# Altium PCB PCB1.PcbDoc
Units mm, origin at the board's own origin, x right, y up, seen from the top; angles counter-clockwise.
Board outline 49.87 x 100 mm, 2 copper layers (Top Layer, Bottom Layer); 57 components, 54 nets, 224 pads, 28 vias.
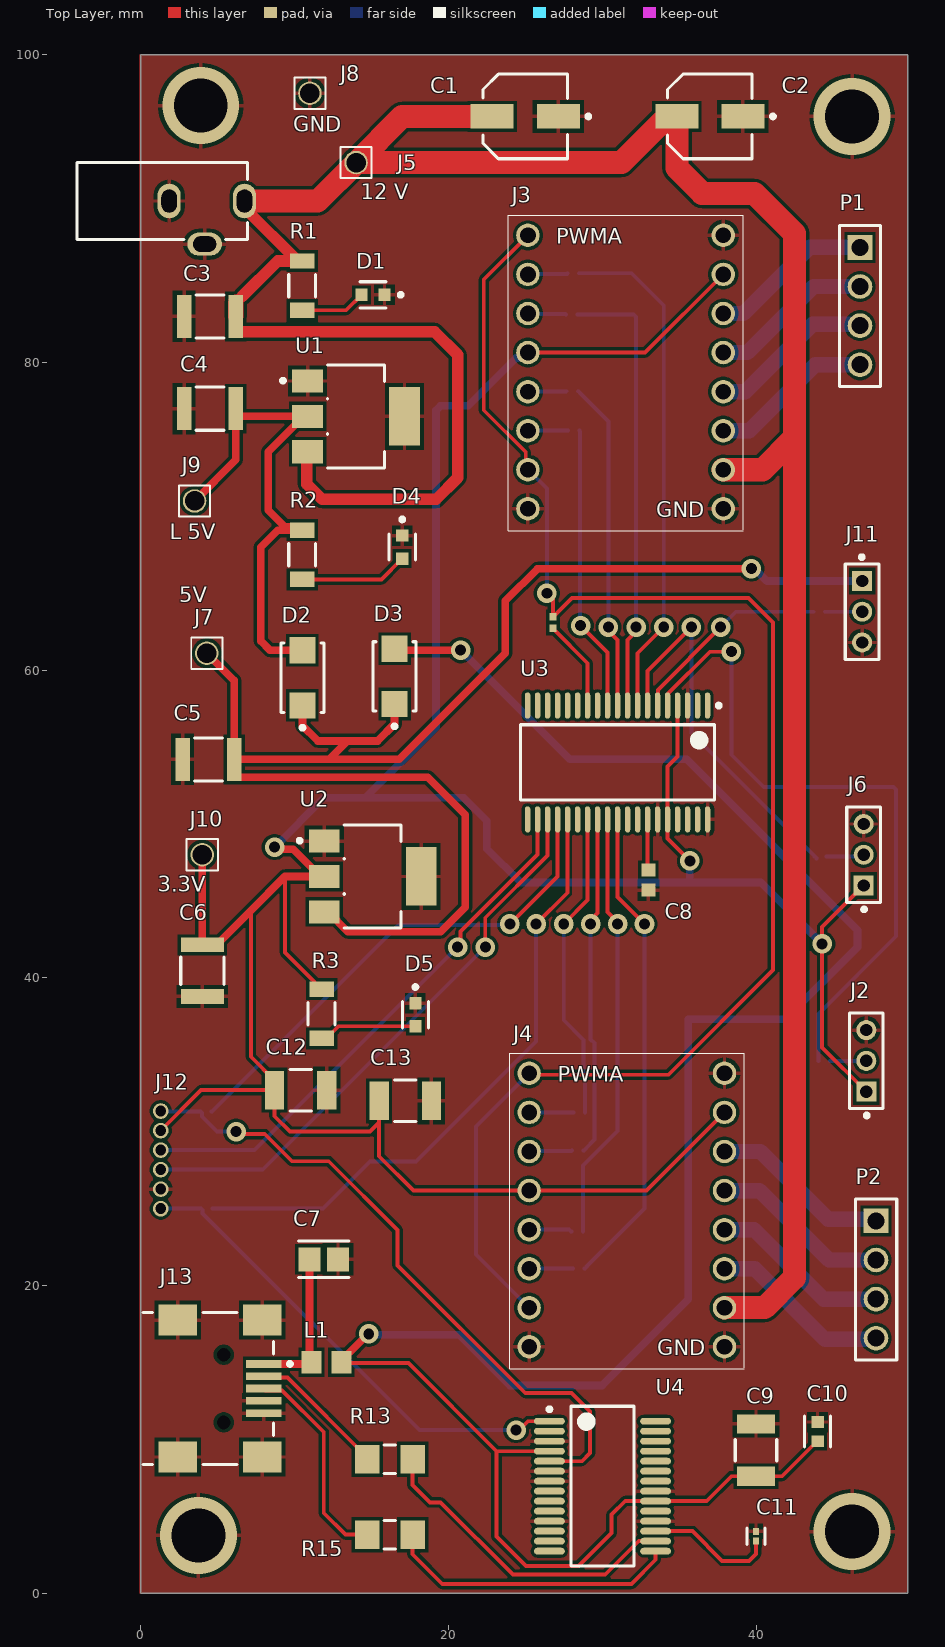
[diagram p0: Top Layer view]
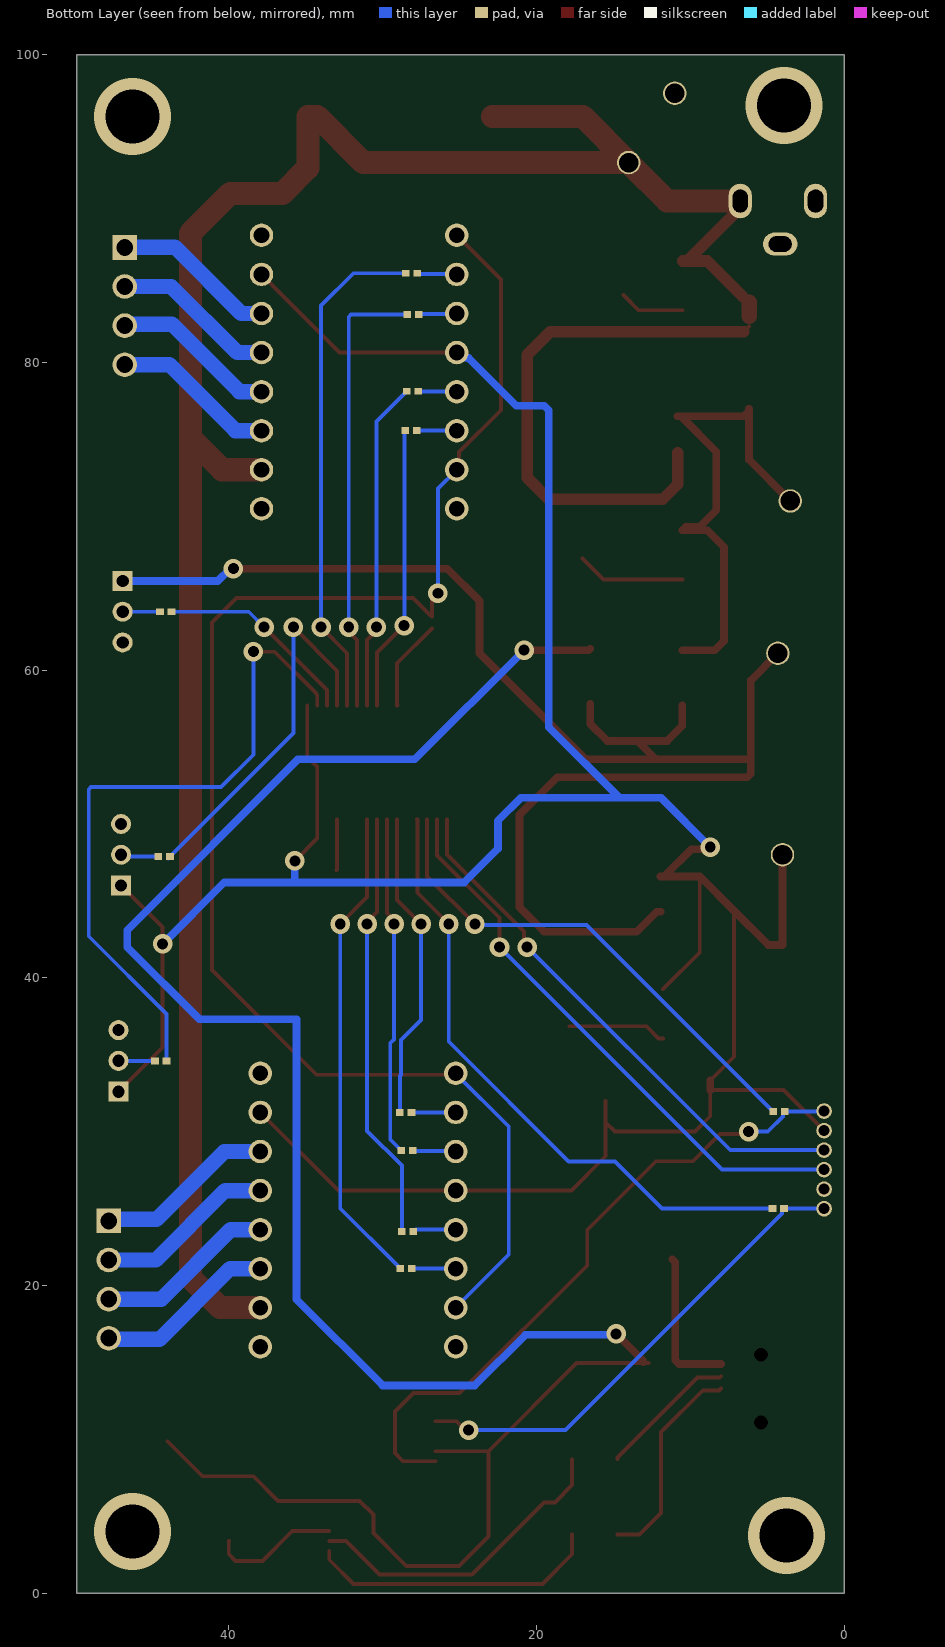
[diagram p1: Bottom Layer view, seen from below]
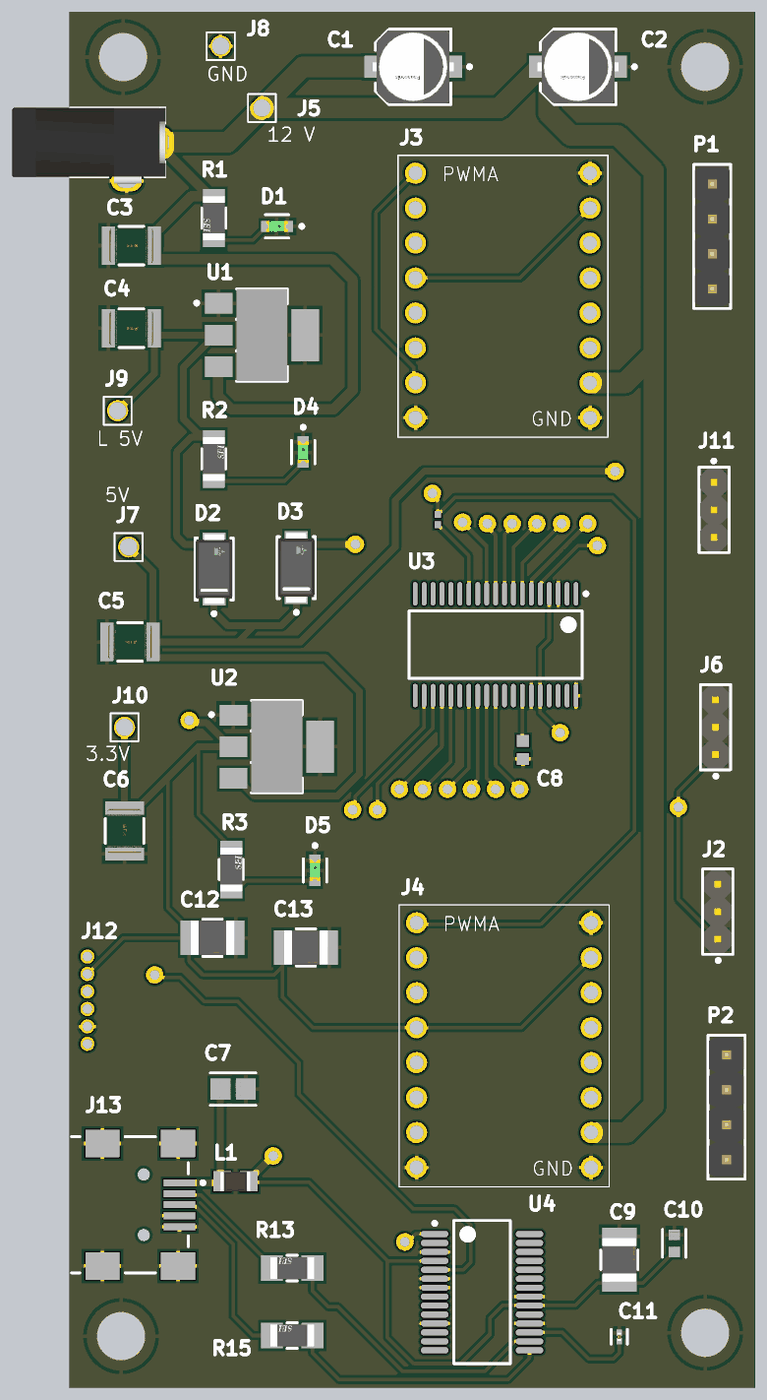
[diagram p2: 3D render of the assembled board from above, using the file's embedded part models]

## Layer stack, top to bottom
Top Solder: solder mask 0.0102, Solder Resist, Dk 3.5
Top Layer: signal copper 0.0356
Dielectric 1: dielectric 0.32, FR-4, Dk 4.8
Bottom Layer: signal copper 0.0356
Bottom Solder: solder mask 0.0102, Solder Resist, Dk 3.5

## Board outline
0,0 49.873,0 49.873,100 0,100

## Design rules (kind name [scope] priority, off if disabled: settings)
Clearance [All] p1: gap=0.2 ignorepadtopadclearanceinfootprint=FALSE
HoleSize [All] p1: absolutevalues=TRUE maxlimit=8 minlimit=0.025 maxpercent=80.000 minpercent=20.000
MinimumSolderMaskSliver [All] p1: minsoldermaskwidth=0.04
PolygonConnect [All] p1: connectstyle=Relief reliefconductorwidth=0.254 reliefentries=4 polygonreliefangle="90 Angle" airgapwidth=0.254
RoutingVias [All] p1: holewidth=0.711 width=1.27 viastyle="Through Hole" minholewidth=0.711 minwidth=1.27 maxholewidth=0.711 maxwidth=1.27
SilkToSolderMaskClearance [IsPad] p1: minsilkscreentomaskgap=0.15 clearancetoexposedcopper=TRUE
SolderMaskExpansion [All] p1: expansion=0.102 istentingtop=FALSE
Width "Width Power (12 V)" [(InNet('12 V') AND InNet('GND'))] p1: maxlimit=2 minlimit=1.75 preferedwidth=1.75
Width "Width Signal" [All] p2: maxlimit=2 minlimit=0.25 preferedwidth=0.254
Width [All] p3: maxlimit=2 minlimit=0.1 preferedwidth=1.75
27 further rules are at their usual default settings.

## Classes and differential pairs
component class Schematic: C1 C2 C3 C4 C5 C6 C7 C8 C9 C10 C11 C12 C13 D1 D2 D3 D4 D5 J2 J3 J4 J5 J6 J7 J8 J9 J10 J11 J12 J13 L1 P1 P2 R1 R2 R3 R4 R13 R15 U1 U2 U3 U4

## Components (designator, comment, footprint, x,y, rotation, side; value= is the part's Value field where it differs from the comment)
C1 "100 uF" FP-FTC-MFG 25,96 r180 top
C2 "100 uF" FP-FTC-MFG 37,96 r180 top
C3 "10 uF" FP-CGA6P-IPC_B 4.5,83 r180 top
C4 "10 uF" FP-CGA6P-IPC_B 4.5,77 r180 top
C5 "10 uF" FP-CGA6P-IPC_B 4.4,54.2 r180 top
C6 "10 uF" FP-CGA6P-IPC_B 4.005,40.465 r270 top
C7 "CL21B103KCANNNC" FP-CL21-IPC_A 11.9,21.7 r180 top
C8 "0.47 uF" CAPC1608X90X35LL15T15 33,46.35 r90 top
C9 "0.1 uF" FP-1210-L_3_2_0_3-W_2_5_0-MFG 40,9.3 r90 top
C10 "4.7 uF" FP-CL10-IPC_C 44,10.5 r90 top
C11 "1 uF" FP-GRM033-0_05-e01_0_2-IPC_B 40,3.706 r90 top
C12 "0.1 uF" FP-1210-L_3_2_0_3-W_2_5_0-MFG 10.4,32.7 r0 top
C13 "0.1 uF" FP-1210-L_3_2_0_3-W_2_5_0-MFG 17.2,32 r0 top
D1 "LTST-C190GKT" FP-LTST-C190GKT-MFG 15.1,84.4 r180 top
D2 "SSA34-E3/61T" FP-95400-MFG 10.516,59.504 r90 top
D3 "SSA34-E3/61T" FP-95400-MFG 16.5,59.6 r90 top
D4 "LTST-C190GKT" FP-LTST-C190GKT-MFG 17,68 r270 top
D5 "LTST-C190GKT" FP-LTST-C190GKT-MFG 17.858,37.602 r270 top
J2 "951103-8622-AR" FP-951103-8622-AR-MFG 47.168,34.602 r90 top
J3 "Pololu Motor Driver" "Pololu Motor Driver-Footprint-2" 25.171,88.268 r0 top
J4 "Pololu Motor Driver" "Pololu Motor Driver-Footprint-2" 25.25,33.79 r0 top
J5 "Test Point" "Test Point-Footprint-1" 14,93 r0 top
J6 "951103-8622-AR" FP-951103-8622-AR-MFG 47,48 r90 top
J7 "Test Point" "Test Point-Footprint-1" 4.3,61.1 r0 top
J8 "Test Point" "Test Point-Footprint-1" 11,97.5 r0 top
J9 "Test Point" "Test Point-Footprint-1" 3.5,71 r0 top
J10 "Test Point" "Test Point-Footprint-1" 4,48 r0 top
J11 "951103-8622-AR" FP-951103-8622-AR-MFG 46.9,63.8 r270 top
J12 "M50-3930642" M50-3930642-Footprint-1 1.3,24.99 r180 top
J13 "KMBX-SMT-5S-S-30TR" KYCN-KMBX-SMT-5S-S-30TR_V 5.2,13.3 r270 top
L1 "MI0805K601R-10" LIRD-MI0805K601R-10-2_V 12.073,15 r180 top
P1 "61300411121" 61300411121 46.761,83.671 r270 top
P2 "61300411121" 61300411121 47.803,20.385 r270 top
R1 "RMCF1206JT1K00" FP-RMCF1206-MFG 10.5,85 r270 top
R2 "RMCF1206JT1K00" FP-RMCF1206-MFG 10.5,67.5 r90 top
R3 "RMCF1206JT1K00" FP-RMCF1206-MFG 11.762,37.666 r90 top
R13 "27 Ohm" FP-RMCF1206-IPC_A 16.2,8.7 r180 top
R15 "27 Ohm" FP-RMCF1206-IPC_A 16.2,3.8 r180 top
R? "RC0402FR-07150RL" RESC1005X40X25LL05T10 44.425,34.6 r180 bottom
U1 "NCP1117ST50T3G" FP-318H-MFG 14,76.5 r0 top
U2 "NCP1117LPST33T3G" FP-318H-MFG 15.081,46.59 r0 top
U3 "MSP430FR5739IDA" TI-DA38_N 31,54 r270 top
U4 "CY7C65213-28PVXI" CYP-PVX28_N 30.019,6.95 r0 top
? "694103303002" 694103303002 1.4,90.5 r270 top
? "RC0402FR-07150RL" RESC1005X40X25LL05T10 28.149,75.568 r0 bottom
? "RC0402FR-07150RL" RESC1005X40X25LL05T10 28.016,83.112 r0 bottom
? "RC0402FR-07150RL" RESC1005X40X25LL05T10 4.275,25 r180 bottom
? "RC0402FR-07150RL" RESC1005X40X25LL05T10 28.124,85.805 r0 bottom
? "RC0402FR-07150RL" RESC1005X40X25LL05T10 44.1,63.8 r180 bottom
? "RC0402FR-07150RL" RESC1005X40X25LL05T10 26.8,63.1 r270 top
? "RC0402FR-07150RL" RESC1005X40X25LL05T10 4.225,31.3 r180 bottom
? "RC0402FR-07150RL" RESC1005X40X25LL05T10 44.2,47.9 r180 bottom
? "RC0402FR-07150RL" RESC1005X40X25LL05T10 28.411,28.767 r0 bottom
? "RC0402FR-07150RL" RESC1005X40X25LL05T10 28.5,31.25 r0 bottom
? "RC0402FR-07150RL" RESC1005X40X25LL05T10 28.048,78.134 r0 bottom
? "RC0402FR-07150RL" RESC1005X40X25LL05T10 28.475,21.1 r0 bottom
? "RC0402FR-07150RL" RESC1005X40X25LL05T10 28.375,23.5 r0 bottom

## Footprints (in the part's own frame and the unit in brackets; to place one, negate y for a bottom-side part, rotate by r counter-clockwise, add the part's x,y. Pads: shape width x height; smd on the part's side, far side on the other; paste and mask are expansions set on the pad)
61300411121 [mm] "Pin Header, pitch 2.54 mm, THT, Vertical, single row, 4p"
  rect 1.6x1.6 hole 1.1: 1(-3.81,0)
  round 1.6 hole 1.1: 2(-1.27,0) 3(1.27,0) 4(3.81,0)
  silkscreen extent -5.23,-1.35 5.23,1.35, body extent -5.08,-1.27 5.08,1.27, height 8.57
694103303002 [mm] "DC Power Jack Right Angled(4.2)"
  oval 2.25x1.5 hole 1 slot 1.5 at 0 deg: 1(0,5.35) 2(0,0.45)
  oval 1.5x2.25 hole 1 slot 1.5 at 90 deg: 3(2.8,2.75)
  silkscreen extent -2.5,-5.55 2.5,5.55, body extent -2.5,-5.55 3,5.75, height 7.8
CAPC1608X90X35LL15T15 [mm] "Chip Capacitor, 2-Leads, Body 1.60x0.81mm, IPC High Density"
  rect 0.85x0.9 smd: 1(-0.65,0) 2(0.65,0)
  body extent -0.88,-0.48 0.87,0.48, height 0.9
CYP-PVX28_N [mm] "SOP, 28-Leads, Body 10.2x5.3mm, Pitch 0.65mm, IPC Medium Density"
  oval 2x0.45 smd: 1(-3.45,4.225) 2(-3.45,3.575) 3(-3.45,2.925) 4(-3.45,2.275) 5(-3.45,1.625) 6(-3.45,0.975) 7(-3.45,0.325) 8(-3.45,-0.325) 9(-3.45,-0.975) 10(-3.45,-1.625) 11(-3.45,-2.275) 12(-3.45,-2.925) 13(-3.45,-3.575) 14(-3.45,-4.225) 15(3.45,-4.225) 16(3.45,-3.575) 17(3.45,-2.925) 18(3.45,-2.275) 19(3.45,-1.625) 20(3.45,-0.975) 21(3.45,-0.325) 22(3.45,0.325) 23(3.45,0.975) 24(3.45,1.625) 25(3.45,2.275) 26(3.45,2.925) 27(3.45,3.575) 28(3.45,4.225)
  silkscreen extent -3.57,-5.2 2.05,5.2, body extent -2.8,-5.2 2.8,5.2, height 2
FP-318H-MFG [mm]
  rect 2x1.5 smd paste+0 mask+0: 1(-3.15,2.3) 2(-3.15,0) 3(-3.15,-2.3)
  rect 2x3.8 smd paste+0 mask+0: 4(3.15,0)
  silkscreen extent -4.87,-3.35 1.85,3.35, body extent -4.25,-3.68 4.25,3.68, height 0.25
FP-1210-L_3_2_0_3-W_2_5_0-MFG [mm]
  rect 1.25x2.5 smd paste+0 mask+0: 1(-1.7,0) 2(1.7,0)
  silkscreen extent -0.7,-1.35 0.7,1.35, body extent -2.42,-1.45 2.42,1.45, height 0.25
FP-95400-MFG [mm]
  rect 1.7x1.68 smd paste+0 mask+0: 1(-1.79,0) 2(1.79,0)
  silkscreen extent -3.37,-1.4 2.25,1.4, body extent -2.74,-1.5 2.74,1.5, height 0.25
FP-951103-8622-AR-MFG [mm]
  rect 1.3x1.3 hole 0.8 paste-1000 mask+0: 1(-2,0)
  round 1.3 hole 0.8 paste-1000 mask+0: 2(0,0) 3(2,0)
  silkscreen extent -3.67,-1.1 3.1,1.1, body extent -3.2,-1.2 3.2,1.2, height 0.25
FP-CGA6P-IPC_B [mm]
  rect 0.953x2.804 smd paste+0 mask+0: 1(-1.675,0) 2(1.675,0)
  silkscreen extent -0.9,-1.4 0.9,1.4, body extent -2.4,-1.65 2.4,1.65, height 0.25
FP-CL10-IPC_C [mm]
  rect 0.758x0.812 smd paste+0 mask+0: 1(-0.627,0) 2(0.627,0)
  silkscreen extent -1.01,-0.85 1.01,0.85, body extent -1.11,-0.55 1.11,0.55, height 0.25
FP-CL21-IPC_A [mm]
  rect 1.455x1.556 smd paste+0 mask+0: 1(-0.926,0) 2(0.926,0)
  silkscreen extent -1.65,-1.18 1.65,1.18, body extent -2.15,-1.28 2.15,1.28, height 0.25
FP-FTC-MFG [mm]
  rect 2.8x1.6 smd paste+0 mask+0: 1(-2.15,0) 2(2.15,0)
  silkscreen extent -4.23,-2.75 2.75,2.75, body extent -3.8,-3 3.8,3, height 0.25
FP-GRM033-0_05-e01_0_2-IPC_B [mm]
  rect 0.461x0.372 smd paste+0 mask+0: 1(-0.306,0) 2(0.306,0)
  silkscreen extent -0.54,-0.59 0.54,0.59, body extent -0.69,-0.34 0.69,0.34, height 0.25
FP-LTST-C190GKT-MFG [mm]
  rect 0.8x0.8 smd paste+0 mask+0: 1(-0.75,0) 2(0.75,0)
  silkscreen extent -1.92,-0.85 0.85,0.85, body extent -1.25,-0.55 1.25,0.55, height 0.25
FP-RMCF1206-IPC_A [mm]
  rect 1.604x1.858 smd paste+0 mask+0: 1(-1.476,0) 2(1.476,0)
  silkscreen extent -0.37,-0.93 0.37,0.93, body extent -2.78,-1.43 2.78,1.43, height 0.25
FP-RMCF1206-MFG [mm]
  rect 1x1.6 smd paste+0 mask+0: 1(-1.6,0) 2(1.6,0)
  silkscreen extent -0.72,-0.87 0.72,0.87, body extent -2.2,-0.97 2.2,0.97, height 0.25
KYCN-KMBX-SMT-5S-S-30TR_V [mm] "SMD, 5-Leads, Body 9.9x9.2mm, Pitch 0.8mm"
  rect 0.5x2.3 smd: 1(-1.6,2.8) 2(-0.8,2.8) 3(0,2.8) 4(0.8,2.8) 5(1.6,2.8)
  rect 2x2.5 smd: 6(-4.45,2.7) 7(4.45,2.7) 8(-4.45,-2.8) 9(4.45,-2.8)
  round 0.6 hole 0.9 unplated: MH1(-2.2,0.2) MH2(2.2,0.2)
  silkscreen extent -4.95,-5.05 4.95,4.63, body extent -4.95,-5.75 4.95,3.45, height 3.9
LIRD-MI0805K601R-10-2_V [mm] "Chip Bead, 2-Leads, Body 2.2 x1.45 mm"
  rect 1.285x1.47 smd: 1(-0.972,0) 2(0.972,0)
  body extent -1.1,-0.72 1.1,0.73, height 1.1
M50-3930642-Footprint-1 [mil]
  round 40 hole 28: 1(0,0) 2(0,-50) 3(0,-100) 4(0,-150) 5(0,-200) 6(0,-250)
"Pololu Motor Driver-Footprint-2" [mil]
  round 60 hole 40.16 paste+0: 1(0,0)
  round 60 hole 40.16: 2(0,-100) 3(0,-200) 4(0,-300) 5(0,-400) 6(0,-500) 7(0,-600) 8(0,-700) 9(500,-700) 10(500,-600) 11(500,-500) 12(500,-400) 13(500,-300) 14(500,-200) 15(500,-100) 16(500,0)
  silkscreen extent -50,-755 551,51
RESC1005X40X25LL05T10 [mm] "Chip Resistor, 2-Leads, Body 1.00x0.50mm, IPC High Density"
  rect 0.5x0.45 smd: 1(-0.375,0) 2(0.375,0)
  body extent -0.53,-0.27 0.53,0.28, height 0.4
"Test Point-Footprint-1" [mil]
  round 60 hole 50: 1(0,0)
  silkscreen extent -40,-40 40,40
TI-DA38_N [mm] "SOP, 38-Leads, Body 12.5x6.1mm, Pitch 0.65mm, IPC Medium Density"
  oval 1.7x0.35 smd: 1(-3.7,5.85) 2(-3.7,5.2) 3(-3.7,4.55) 4(-3.7,3.9) 5(-3.7,3.25) 6(-3.7,2.6) 7(-3.7,1.95) 8(-3.7,1.3) 9(-3.7,0.65) 10(-3.7,0) 11(-3.7,-0.65) 12(-3.7,-1.3) 13(-3.7,-1.95) 14(-3.7,-2.6) 15(-3.7,-3.25) 16(-3.7,-3.9) 17(-3.7,-4.55) 18(-3.7,-5.2) 19(-3.7,-5.85) 20(3.7,-5.85) 21(3.7,-5.2) 22(3.7,-4.55) 23(3.7,-3.9) 24(3.7,-3.25) 25(3.7,-2.6) 26(3.7,-1.95) 27(3.7,-1.3) 28(3.7,-0.65) 29(3.7,0) 30(3.7,0.65) 31(3.7,1.3) 32(3.7,1.95) 33(3.7,2.6) 34(3.7,3.25) 35(3.7,3.9) 36(3.7,4.55) 37(3.7,5.2) 38(3.7,5.85)
  silkscreen extent -3.82,-6.3 2.45,6.7, body extent -3.1,-6.3 3.1,6.3, height 1.2

## Part data
C1 C2: library part CMP-05427-000077-1, "CAP ALUM 100UF 20% 16V SMD", Capacitance=100uF, Case/Package=Radial, ESR (Equivalent Series Resistance)=360mR, Leakage Current=16uA, Max Operating Temperature=105°C, Min Operating Temperature=-55°C, Package Quantity=1000, Ripple Current=240mA, Tolerance=20%, Voltage=16V, Construction=Cylindrical, Contact Plating=Tin, Diameter=5mm, Height=5.8mm, Height - Seated (Max)=0.24inch, Lead Diameter=0.65mm, Lead Pitch=1.5mm, Length=5.8mm, Life (Hours)=2000Hour, Mount="Surface Mount", Packaging="Tape and Reel", Radiation Hardening=No, REACH SVHC="No SVHC", Ripple Current (AC)=240mA, RoHS Compliant=Yes, Series=FT, Termination=SMD/SMT, Voltage Rating=16V, Voltage Rating (DC)=16V
C3 C4 C5 C6: library part CMP-08246-001838-1, "Cap Ceramic 10uF 25V X7R 20% Pad SMD 1210 +125°C Automotive T/R", Capacitance=10uF, Case Code (Imperial)=1210, Case Code (Metric)=3225, Dielectric=X7R, Max Operating Temperature=125°C, Min Operating Temperature=-55°C, Package Quantity=1, Ratings=AEC-Q200, Tolerance=20%, Voltage Rating=25V, Case/Package=1210, Composition=Ceramic, Depth=2.5mm, Height=2.5mm, Length=3.2mm, Mount="Surface Mount", Packaging="Tape and Reel", Termination=SMD/SMT, Thickness=0.11inch, Voltage Rating (DC)=25V, Weight=0.000564oz, Width=0.098inch
C7: library part CMP-13271-003077-1, "CL21 Series 0805 10nF 100V ±10% Tolerance X7R Multilayer Ceramic Chip Capacitor", Capacitance=10nF, Case Code (Imperial)=0805, Case Code (Metric)=2012, Dielectric=X7R, Max Operating Temperature=125°C, Min Operating Temperature=-55°C, Package Quantity=1, Tolerance=10%, Voltage=100V, Case/Package=0805, Contact Plating=Tin, Depth=1.25mm, Height=0.65mm, Length=2mm, Material=Ceramic, Mount="Surface Mount", Packaging="Tape and Reel", Radiation Hardening=No, Thickness=0.03inch, Voltage Rating=100V, Width=0.049inch
C8: library part CMP-2006-04570-1, Manufacturer="AVX Interconnect / Elco", Part Number=0603ZG474ZAT2A
C9 C12 C13: library part CMP-14477-003861-2, "None", Capacitance=100nF, Case Code (Imperial)=1210, Case Code (Metric)=3225, Dielectric=X7R, Dielectric Material=Ceramic, Max Operating Temperature=125°C, Min Operating Temperature=-55°C, Package Quantity=2000, Tolerance=20%, Voltage Rating=100V, Case/Package=1210, Construction=Flat, Depth=2.5mm, Halogen Free="Halogen Free", Height=1.15mm, Length=0.126inch, Mount="Surface Mount", Number of Pins=2, Packaging="Tape and Reel", Radiation Hardening=No, Resistor Type=Ceramic, RoHS Compliant=Yes, Series=M, Termination=SMD/SMT, Thickness=0.049inch, Voltage Rating (DC)=100V, Width=0.098inch
C10: library part CMP-13271-003017-1, "Cap Ceramic 4.7uF 10V X5R ±10% Pad SMD 0603 +85°C T/R", Capacitance=4.7uF, Case Code (Imperial)=0603, Case Code (Metric)=1608, Dielectric=X5R, Max Operating Temperature=85°C, Min Operating Temperature=-55°C, Package Quantity=1, Tolerance=10%, Voltage Rating=10V, Case/Package=0603, Contact Plating=Tin, Depth=0.8mm, Height=0.8mm, Length=1.6mm, Mount="Surface Mount", Packaging="Tape and Reel", Radiation Hardening=No, Thickness=0.035inch, Width=0.031inch
C11: library part CMP-06035-049033-1, "Chip Multilayer Ceramic Capacitors for General Purpose, 0201, 1.0uF, X5R, 15%, 20%, 6.3V", Capacitance=1uF, Case Code (Imperial)=0201, Case Code (Metric)=0603, Dielectric=X5R, Max Operating Temperature=85°C, Min Operating Temperature=-55°C, Package Quantity=1, Tolerance=20%, Voltage=6.3V, Case/Package=0201, Depth=0.3mm, Height=0.3mm, Lead Free="Lead Free", Length=0.6mm, Mount="Surface Mount", Packaging="Cut Tape", REACH SVHC="No SVHC", Termination=SMD/SMT, Thickness=300um, Voltage Rating=6.3V, Voltage Rating (DC)=6.3V, Weight=1.2E-05oz, Width=0.3mm
D1 D4 D5: library part CMP-22017-000005-2, "LED GREEN CLEAR CHIP SMD", Case Code (Imperial)=0603, Case Code (Metric)=1608, Color=Green, Forward Current=30mA, Forward Voltage=2.1V, Lens Color=Colorless, Max Operating Temperature=85°C, Min Operating Temperature=-55°C, Package Quantity=1, Power Dissipation=100mW, Reverse Voltage=5V, Test Current=10mA, Voltage=2V, Case/Package=0603, Depth=0.8mm, Dominant Wavelength=569nm, Height=0.8mm, Illumination Color=Green, Lead Free="Lead Free", Length=1.6mm, Lens Style=Clear, Lens Transparency=Clear, Luminous Intensity=6mcd, Mount="Surface Mount", Number of Elements=1, Number of LEDs=1, Number of Pins=2, Packaging="Tape and Reel", Power Rating=100mW, Radiation Hardening=No, Viewing Angle=130°, Wavelength=565nm, Width=0.8mm
D2 D3: library part CMP-02539-000022-2, "DIODE SCHOTTKY 40V 3A DO214AC", Average Rectified Current=3A, Case/Package=SMA, Forward Voltage=490mV, Max Forward Surge Current (Ifsm)=75A, Max Operating Temperature=150°C, Max Repetitive Reverse Voltage (Vrrm)=40V, Max Reverse Current=200uA, Min Operating Temperature=-65°C, Package Quantity=1, Contact Plating=Tin, Current Rating=3A, Element Configuration=Single, Forward Current=3A, Height=2.087mm, Lead Free="Lead Free", Length=4.5mm, Max Reverse Leakage Current=200uA, Max Reverse Voltage (DC)=40V, Max Surge Current=75A, Mount="Surface Mount", Number of Pins=2, Output Current=3A, Packaging="Tape and Reel", Peak Non-Repetitive Surge Current=75A, Polarity=Standard, Radiation Hardening=No, RoHS Compliant=Yes, Voltage Rating (DC)=40V, Width=2.79mm
J2 J6 J11: library part CMP-05379-000003-1, "CONN HEADER VERT 3POS 2MM", Current Rating=2A, Manufacturer=3M, Temperature="-55°C to +125°C", Temperature Range High=+125°C, Temperature Range Low=-55°C, Automotive=No, Category=Conn, ComponentLink2Description=Datasheet, ComponentLink2URL=http://multimedia.3m.com/mws/media/1400506O/3m-pin-strip-header-951-series-78-5100-2653-3.pdf, Conn Gender=Male, Conn Orientation=Straight, Contact Material=Gold,Nickel, Device Class L1=Connectors, Device Class L2="Headers and Wire Housings", Device Class L3=unset, Digikey Description="CONN HEADER VERT 3POS 2MM", Height=6.3mm, Lead Free=Yes, Manufacturer Part Number=951103-8622-AR, Mouser Description="Header; PinStrip; CopperAlloy; HighTempThermoplastic; 3Cnts; 1A; RtAngle; 951Series", Number Of Contacts=3, Number Of Rows=1, Octopart=https://octopart.com/951103-8622-ar-3m-14400669, Package=951103-8622-AR, Pitch=2mm, RoHS=TRUE
J3 J4: library part CMP-00028-00007-3, "Set up for the Pololu Motor Driver"
J5 J7 J8 J9 J10: library part CMP-00000-3, "Test point to check infromation about pcb"
J12: library part CMP-002-00071-5, "Btb Conn, Header, 6Pos, 1Rows, 1.27Mm; Rohs Compliant: Yes", Current Rating=1A, Flammability Rating="UL94 V-0", Insulation Color=Black, Max Operating Temperature=105°C, Min Operating Temperature=-40°C, Connector Type=Header, Contact Finish - Mating=GOLD, Contact Material=Brass, Contact Plating=Gold, Contact Shape=Square, Contact Type="Male Pin", Fastening Type=Pull, Insulation Material=Nylon, Mount="Through Hole", Number of Positions=6, Number Of Rows=1, Packaging=Bulk, Series="Archer M50", Termination=Solder
J13: library part CMP-1673-00002-6, "Female Mini-USB, RA, -55 to 85 degC, 5-Pin SMD, RoHS, Tape and Reel", Colour=Black, Current Rating="1 A", Manufacturer=Kycon, ComponentLink1Description="Manufacturer URL", ComponentLink1URL=http://www.kycon.com/, ComponentLink2Description=Datasheet, ComponentLink2URL=https://datasheet.ciiva.com/4599/kmbx-smt-5s-s-30tr-180268-4599029.pdf, Connector Type=USB, Contact Material=Bronze, Contact Plating=Gold, DatasheetVersion="Rev. A7, 11/2013", Height="3.9 mm", Lead Pitch="0.8 mm", Length="9.9 mm", Mount="Surface Mount", Mounting Technology="Surface Mount", PackageDescription="5-Pin Surface Mount Device, Body 9.9 x 9.2 mm, Pitch 0.8 mm", PackageReference=KMBX-SMT-5S-S-30TR, Packaging="Tape and Reel", Pins=5, RoHSCompliant=true
L1: library part CMP-2000-05196-1, "Chip Bead for Power Filtering, 1500 mA, 600 Ohm, -40 to 125 degC, 0805 (2012 Metric), RoHS, Tape and Reel", Current Rating (Max)=1.5A, DC Resistance (DCR) (Max)=100mOhm, Impedance @ Frequency=600Ohm@100MHz, Manufacturer=Laird, Operating Temperature=-40degC~125degC, Package / Case=0805(2012Metric), Package Description="2-Pin Surface Mount Device, Body 2 x 1.25 mm", Package Reference=MI0805K601R-10-2, Ratings=-, Standard Package=1, Catalog Drawings=(HI,HZ,LI,MI)0805Series_1.10mmMax.Height, Category=Filters, Datasheet URL=https://datasheet.ciiva.com/3082/mi0805k601r-10-a-vp-3082219.pdf, Datasheet Version="Rev. A, 01/2004", Family=FerriteBeadsandChips, Filter Type=PowerLine, Height (Max)="0.043\"(1.10mm)", Kits=240-2227-ND-KITEMIFERRITEBEADCHIPSMD, Manufacturer URL=https://www.lairdtech.com, Mounting Type=SurfaceMount, Number of Lines=1, Online Catalog=MISeries, Other Names=240-2390-1, Packaging=CutTape(CT), Series=MI, Size / Dimension="0.079\"Lx0.049\"W(2.00mmx1.25mm)"
P1 P2: library part CMP-1502-01064-1, "THT Vertical Pin Header WR-PHD, Pitch 2.54 mm, Single Row, 4 pins", Contact Resistance=20mOhm, Manufacturer="Wurth Elektronik", Operating Temperature=-40to105degC, Rated Current=3A, Withstanding Voltage=500VAC, Working Voltage=250VAC, Datasheet URL=https://katalog.we-online.de/em/datasheet/6130xx11121.pdf, Gender=Male, Manufacturer URL=http://www.we-online.de, Mounting Technology=THT, Orientation=Vertical, Package Reference=61300411121, Packaging=Bag, Part Number=61300411121, Pin Number=4, Pitch=2.54mm, Publisher=WurthElektronik, Row Number=Single
R1 R2 R3: library part CMP-26527-000044-1, "1kΩ ±5% 0.25W 1206 Thick Film Chip Resistor AEC-Q200 compliant", Case Code (Imperial)=1206, Case Code (Metric)=3216, Max Operating Temperature=155°C, Max Power Dissipation=250mW, Min Operating Temperature=-55°C, Resistance=1kR, Resistor Type="Thick Film", Temperature Coefficient=200ppm/°C, Tolerance=5%, Working Voltage=200V, Case/Package=1206, Construction=Rectangular, Contact Plating=Tin, Depth=1.6mm, Features="Automotive AEC-Q200", Height=0.028inch, Lead Free="Lead Free", Length=3.2mm, Military Standard=Not, Mount="Surface Mount", Number of Terminations=2, Packaging="Tape and Reel", Power Rating=250mW, Radiation Hardening=No, RoHS Compliant=Yes, Series=RMCF, Width=0.063inch
R13 R15: library part CMP-26527-000116-1, "27Ω ±5% 0.25W 1206 Thick Film Chip Resistor AEC-Q200 compliant", Case Code (Imperial)=1206, Case Code (Metric)=3216, Max Operating Temperature=155°C, Max Power Dissipation=250mW, Min Operating Temperature=-55°C, Resistance=27R, Resistor Type="Thick Film", Temperature Coefficient=200ppm/°C, Tolerance=5%, Case/Package=1206, Contact Plating=Tin, Features="Automotive AEC-Q200", Height=0.028inch, Length=0.126inch, Mount="Surface Mount", Number of Terminations=2, Packaging="Tape and Reel", Radiation Hardening=No, RoHS Compliant=Yes, Series=RMCF, Width=0.063inch
R? ? ? ? ? ? ? ? ? ? ? ? ? ?: library part CMP-2002-07401-1, Manufacturer="Yageo / Phycomp", Part Number=RC0402FR-07150RL
U1: library part CMP-0592-00001-4, "IC REG LINEAR 5V 1A SOT223", Case/Package=SOT-223, Dropout Voltage=1.2V, Input Bias Current=6mA, Max Input Voltage=20V, Max Operating Temperature=125°C, Max Output Current=1A, Min Input Voltage=3.5V, Min Operating Temperature=0°C, Nominal Output Voltage=5V, Output Voltage Accuracy=1%, Package Quantity=1, Power Rating=781mW, Quiescent Current=10mA, Accuracy=1%, Contact Plating=Tin, Halogen Free="Halogen Free", Height=1.69mm, Lead Free="Lead Free", Length=6.7mm, Min Current Limit=1A, Number of Outputs=1, Number of Pins=4, Number of Regulators=1, Output Current=1A, Output Type=Fixed, Output Voltage=5V, Packaging="Tape and Reel", Polarity=Positive, Radiation Hardening=No, REACH SVHC="No SVHC", RoHS Compliant=Yes, Tolerance=1%, Width=3.7mm
U2: library part CMP-07128-000031-1, "IC REG LINEAR 3.3V 1A SOT223", Case/Package=SOT-223, Dropout Voltage=1.3V, Max Input Voltage=18V, Max Operating Temperature=125°C, Max Output Current=1A, Min Current Limit=1.1A, Min Input Voltage=-300mV, Min Operating Temperature=0°C, Min Output Voltage=3.3V, Package Quantity=1, Power Supply Rejection Ratio (PSRR)=60dB, Quiescent Current=700uA, Reference Voltage=1.275V, Contact Plating=Tin, Halogen Free="Halogen Free", Height=1.69mm, Lead Free="Lead Free", Length=6.7mm, Mount="Surface Mount", Nominal Output Voltage=3.3V, Number of Outputs=1, Number of Pins=3, Number of Regulators=1, Output Current=1A, Output Type=Fixed, Output Voltage=3.3V, Packaging="Tape and Reel", Polarity=Positive, REACH SVHC="No SVHC", Width=3.7mm
U3: library part CMP-0365-00023-1, "24 MHz Mixed Signal Microcontroller, 1024 B SRAM and 33 GPIOs, -40 to 85 degC, 38-pin SOP (DA), Green (RoHS & no Sb/Br)", Frequency(MHz)=24, Manufacturer="Texas Instruments", ADC="10-bit SAR", ADC Channels=14, Brown Out Reset=Yes, Code_JEDEC=MO-153, Comparators=Yes, ComponentLink1Description="Manufacturer URL", ComponentLink1URL=http://www.ti.com/, ComponentLink2Description=Datasheet, ComponentLink2URL=http://www.ti.com/general/docs/lit/getliterature.tsp?genericPartNumber=MSP430FR5739&fileType=pdf, ComponentLink3Description="Package Specification", ComponentLink3URL=http://www.ti.com/lit/ml/mtss002e/mtss002e.pdf, DatasheetVersion=SLAS639D, DMA=3, Eco-Plan="Green (RoHS & no Sb/Br)", FRAM(KB)=16, GPIO=33, Mounting Technology="Surface Mount", Multiplier=32x32, PackageDescription="38-Pin Plastic Small-Outline Package, Body 6.10 x 12.50 mm, Pitch 0.65 mm", PackageReference=DA38, PackageVersion=4040066/F, PartNumber=MSP430FR5739IDA, Real-Time Clock=Yes, SRAM(B)=1024, SubFamily="FRAM Series", SVS=Yes, Timers - 16-bit=5, USCI_A (UART/LIN/IrDA/SPI)=2, USCI_B (I2C & SPI)=1, Watchdog=Yes
U4: library part CMP-0967-00144-1, "USB-UART LP Bridge Controller, 0.5 KB, 8 I/Os, 1.71 to 5.5 V, -40 to 85 degC, 28-Pin SSOP (PVX28), Tray", Manufacturer=Cypress, Max. Operating Temp. (degreesC)=85, Max. Operating Voltage (V)=5.5, Min. Operating Temp. (degreesC)=-40, Min. Operating Voltage (V)=1.71, ComponentLink1Description="Manufacturer URL", ComponentLink1URL=http://www.cypress.com/, ComponentLink2Description=Datasheet, ComponentLink2URL=http://www.cypress.com/?docID=47660, ComponentLink3Description="Package Specification", ComponentLink3URL=http://www.cypress.com/?docID=1371, CPU Core=M8, DatasheetVersion="Rev. *G", Memory Architecture=Flash, Memory Size (KB)=0.5, Mounting Technology="Surface Mount", No. of I/Os=8, PackageDescription="28-Pin Super Small Outline Package, Body 10.2 x 5.3 mm, Pitch 0.65 mm", PackageReference=PVX28, PackageVersion="Rev. *C, 10/2001", Packing=Tray, PartNumber=CY7C65213-28PVXI, RoHS=Pb-Free
?: library part CMP-1502-00185-1, "DC Power Jack Connector WR-DC, Male, Right Angled, THT, 2 A, 30 V", Manufacturer="Wurth Elektronik", Operating Temperature=-40to85degC, Rated Current=2A, Working Voltage=30V, Datasheet URL=http://katalog.we-online.de/em/datasheet/6941xx303002.pdf, Gender=Male, Manufacturer URL=http://www.we-online.de, Mounting Technology=THT, Opening Diameter=4.2mm, Orientation=RightAngled, Package Reference=694103303002, Packaging=Bag, Part Number=694103303002, Plug Inner Diameter=1.35mm, Plug Outer Diameter=3.5mm, Publisher=WurthElektronik

## Via types
v1: diameter 1.27, hole 0.711, Top Layer to Bottom Layer, 24 vias
v2: diameter 5, hole 3.5, Top Layer to Bottom Layer, 4 vias

## Nets (pads, with @x,y where several pads share a name; then routed paths per layer and width w, separated by ;. In a path a pad name is that pad's centre, name@x,y a point inside that pad or via, vN(x,y) a via of type N, cw(c..) or ccw(c..) an arc to the next point about the centre after c; other vN are vias at no path point)
"5 V": C5.1 D2.1 D3.1 J7.1 J11.1 U2.3 | length 100.4
  Top Layer w0.5: J7.1 6.075,59.325 C5.1 6.075,53.274 6.302,53.048 18.652,53.048 21.1,50.6 21.1,44.6 19.5,43 13.471,43 12.181,44.29 U2.3 ; C5.1@6.227,54.2 12.25,54.2 ; D2.1 10.516,56.384 11.5,55.4 13.45,55.4 ; D3.1 16.5,56.5 15.4,55.4 13.45,55.4 ; v1(39.7,66.6) 25.8,66.6 23.7,64.5 23.7,61.1 16.8,54.2 12.25,54.2 ; 12.25,54.2 13.45,55.4
  Bottom Layer w0.5: v1(39.7,66.6) 39.908,66.6 40.708,65.8 J11.1
"12 V": ?.1@6.75,90.5 C1.2 C2.2 C3.1 J3.10 J4.10 J5.1 R1.1 U1.3 | length 179.2
  Top Layer w0.254: C3.1@6.175,82.35 C3.1@6.525,82 ; ?.1@6.75,90.05 ?.1@6.75,90.5 ; U1.3@10.8,74.15 U1.3
  Top Layer w0.75: C3.1@6.525,82 19.1,82 20.6,80.5 20.6,72.5 19.2,71.1 11.8,71.1 10.8,72.1 U1.3@10.8,74.15 ; C3.1@6.575,84.275 8.9,86.6 R1.1@10.2,86.6 ; ?.1@6.75,90.05 R1.1@10.2,86.6 ; R1.1 R1.1@10.2,86.6
  Top Layer w1: C3.1 C3.1@6.175,83.926
  Top Layer w1.5: ?.1@6.75,90.5 11.5,90.5 J5.1 ; C1.2 17,96 J5.1 ; J3.10 40.428,73.028 42.5,75.1 ; J4.10 37.955,18.555 40.555,18.555 42.5,20.5 42.5,75.1 ; J5.1 31.25,93 34.25,96 C2.2 34.85,92.65 36.5,91 39.9,91 42.5,88.4 42.5,75.1
GND: ?.2@1.85,90.5 ?.3 C1.1 C2.1 C3.2 C4.2 C5.2 C6.2 C7.1 C8.1 C9.2 C10.2 C11.2 C12.2 C13.2 D1.1 D4.1 D5.1 J2.3 J3.8 J3.9 J3.16 J4.8 J4.9 J4.16 J6.3 J8.1 J11.3 J12.2 J13.4 J13.5 J13.6 J13.7 J13.8 J13.9 U1.1 U1.4 U2.1 U2.4 U3.3 U3.33 U3.38 U4.3 U4.6 U4.7 U4.11 U4.18 U4.21
  other v2: 3.75,3.75 46.25,4 46.25,96 3.9,96.7
"Left Limit Signal": J2.2 R?.1 | length 2.4
  Bottom Layer w0.254: J2.2 47.167,34.601 R?.1 ; R?.1 R?.1
"Logic 5V": C4.1 D2.2 J9.1 R2.2 U1.2 | length 33.9
  Top Layer w0.5: J9.1 6.175,73.675 C4.1@6.175,76.85 ; C4.1 C4.1@6.175,76.85 ; D2.2 8.406,61.294 7.8,61.9 7.8,68 8.9,69.1 R2.2 10.27,69.33 9.37,69.33 8.3,70.4 8.3,74.2 U1.2@10.6,76.5 ; U1.2 U1.2@10.6,76.5 ; C4.1@6.175,76.85 6.525,76.5 U1.2@10.6,76.5
"micro 3.3 V": C6.1 C12.1 C13.1 J2.1 J3.4 J3.15 J4.4 J4.15 J6.1 J10.1 J12.5 R3.2 U2.2 U3.4 U3.34 | length 206.2
  Top Layer w0.254: J12.5 3.93,32.7 C12.1 8.7,31 9.7,30 14.9,30 15.5,30.6 ; 7.156,44.365 7.156,34.869 C12.1@8.7,33.325 ; 9.381,46.59 9.381,41.647 R3.2 ; C13.1 15.5,30.6 ; J3.4 32.791,80.648 J3.15 ; U3.4 34.9,54.4 34.25,53.75 U3.34 34.25,49.05 v1(35.7,47.6) ; J4.15 32.87,26.17 J4.4 17.73,26.17 15.5,28.4 15.5,30.6 ; J6.1 44.3,43.3 v1(44.3,42.2) 44.3,35.47 J2.1
  Top Layer w0.5: J10.1 4,42.145 C6.1 4.931,42.14 7.156,44.365 9.381,46.59 U2.2@11.681,46.59 ; C12.1 C12.1@8.7,33.325 ; v1(8.7,48.5) 8.847,48.353 9.918,48.353 U2.2@11.681,46.59 ; U2.2 U2.2@11.681,46.59
  Bottom Layer w0.5: v1(8.7,48.5) 11.9,51.7 14.6,51.7 ; J3.4 24.894,80.648 24.537,80.291 24.391,80.291 21.3,77.2 19.493,77.2 19.2,76.907 19.2,56.3 14.6,51.7 ; v1(35.7,47.6) 35.7,46.2 ; v1(44.3,42.2) 40.3,46.2 35.7,46.2 ; 14.6,51.7 21,51.7 22.5,50.2 22.5,48.4 24.7,46.2 35.7,46.2
NetC7_2: C7.2 J13.1 L1.2 | length 9.7
  Top Layer w0.5: J13.1 10.727,14.9 10.777,14.95 10.976,15.148 10.976,21.502 C7.2@11.174,21.7
NetC8_2: C8.2 U3.32 | length 3.3
  Top Layer w0.254: U3.32 32.95,47.05 C8.2
NetC11_1: C11.1 U4.17 | length 8.4
  Top Layer w0.254: U4.17 35.875,4.025 37.8,2.1 39.551,2.1 40,2.549 40,3.375 39.987,3.388 C11.1
NetD1_2: D1.2 R1.2 | length 4.3
  Top Layer w0.254: R1.2 13.35,83.4 D1.2
NetD4_2: D4.2 R2.1 | length 7.1
  Top Layer w0.254: R2.1 15.65,65.9 D4.2
NetD5_2: D5.2 R3.1 | length 6.4
  Top Layer w0.254: R3.1 12.062,36.066 12.848,36.852 D5.2
NetJ13_2: J13.2 R13.2 | length 9
  Top Layer w0.254: J13.2 8.079,14.021 9.531,14.021 14.724,8.827 R13.2
NetJ13_3: J13.3 R15.2 | length 13.7
  Top Layer w0.254: J13.3 8.123,13.177 9.185,13.177 11.9,10.462 11.9,5.2 13.3,3.8 R15.2
NetR4_2: R?.2 U3.5 | length 44.1
  Top Layer w0.254: U3.5 34.25,58.401 34.321,58.472 34.321,58.506 37.015,61.2 v1(38.4,61.2)
  Bottom Layer w0.254: v1(38.4,61.2) 38.4,54.5 40.5,52.4 48.951,52.4 49.1,52.251 49.1,42.7 44.05,37.65 R?.2
NetR5_1: ?.1@4.6,31.3 U3.23 | length 32.5
  Top Layer w0.254: v1(24,43.5) 27.1,46.6 U3.23
  Bottom Layer w0.254: ?.1@4.6,31.3 4.625,31.3 16.755,43.43 23.93,43.43 v1(24,43.5)
NetR6_2: ?.2@43.725,63.8 U3.6 | length 13.2
  Top Layer w0.254: U3.6 33.618,57.718 33.618,58.718 v1(37.7,62.8)
  Bottom Layer w0.254: v1(37.7,62.8) 38.7,63.8 ?.2@43.725,63.8
NetR7_1: ?.1@4.65,25 U3.24 | length 40.8
  Top Layer w0.254: v1(25.7,43.5) 27.732,45.532 27.732,50.282 U3.24
  Bottom Layer w0.254: ?.1@4.65,25 11.837,25 14.9,28.063 17.9,28.063 25.7,35.863 v1(25.7,43.5)
NetR8_2: ?.2@43.825,47.9 U3.7 | length 24.7
  Top Layer w0.254: U3.7 32.95,59.95 v1(35.8,62.8)
  Bottom Layer w0.254: v1(35.8,62.8) 35.8,55.925 43.702,48.023 43.702,47.998 43.8,47.9 43.837,47.9 43.936,47.802 ?.2@43.936,47.765
NetR9_2: ?.2@26.8,62.725 U3.13 | length 6
  Top Layer w0.254: ?.2@26.8,62.725 26.8,62.7 29.05,60.45 U3.13 U3.13@29.032,57.718
NetR10_2: ?.2@28.499,85.805 U3.8 | length 33.1
  Top Layer w0.254: U3.8 32.3,61.1 v1(34,62.8)
  Bottom Layer w0.254: ?.2@28.499,85.805 31.895,85.805 34,83.7 v1(34,62.8)
NetR11_2: ?.2@28.391,83.112 U3.9 | length 29.4
  Top Layer w0.254: U3.9 31.65,61.975 32.2,62.525 v1(32.2,62.8)
  Bottom Layer w0.254: ?.2@28.391,83.112 32.051,83.112 32.2,82.963 v1(32.2,62.8)
NetR12_2: ?.2@28.423,78.134 U3.10 | length 21.5
  Top Layer w0.254: v1(30.4,62.8) 30.4,62.563 31,61.963 U3.10
  Bottom Layer w0.254: ?.2@28.423,78.134 28.448,78.134 28.546,78.036 28.546,78.011 30.4,76.156 v1(30.4,62.8)
NetR13_1: R13.1 U4.16 | length 20.8
  Top Layer w0.254: R13.1 17.676,7.024 18.8,5.9 19.5,5.9 24.2,1.2 30.2,1.2 32.375,3.375 U4.16
NetR14_2: ?.2@28.524,75.568 U3.11 | length 18.6
  Top Layer w0.254: v1(28.6,62.9) 30.35,61.15 U3.11
  Bottom Layer w0.254: ?.2@28.524,75.568 28.562,75.53 28.562,62.938 v1(28.6,62.9)
NetR15_1: R15.1 U4.15 | length 19.1
  Top Layer w0.254: R15.1 17.676,2.524 19.6,0.6 31.9,0.6 33.469,2.169 U4.15
NetR16_2: ?.2@28.875,31.25 U3.26 | length 20.3
  Top Layer w0.254: v1(27.5,43.5) 29.05,45.05 U3.26
  Bottom Layer w0.254: v1(27.5,43.5) 27.5,37.25 28.796,35.954 28.796,33.691 28.875,33.612 ?.2@28.875,31.25
NetR17_2: ?.2@28.786,28.767 U3.27 | length 22.1
  Top Layer w0.254: v1(29.25,43.5) 29.25,43.775 29.7,44.225 U3.27
  Bottom Layer w0.254: ?.2@28.786,28.767 28.811,28.767 28.909,28.865 28.909,28.89 29.5,29.481 29.5,35.75 29.25,36 v1(29.25,43.5)
NetR18_2: ?.2@28.75,23.5 U3.28 | length 28
  Top Layer w0.254: U3.28 30.35,44.287 31,43.637 v1(31,43.5)
  Bottom Layer w0.254: ?.2@28.75,23.5 28.75,27.794 31,30.044 v1(31,43.5)
NetR19_2: ?.2@28.85,21.1 U3.29 | length 31.6
  Top Layer w0.254: U3.29 31,45.25 v1(32.75,43.5)
  Bottom Layer w0.254: ?.2@28.85,21.1 28.875,21.1 28.973,21.198 28.973,21.223 32.75,25 v1(32.75,43.5)
"Right Limit Signal": ?.1@44.575,47.9 J6.2 | length 2.5
  Bottom Layer w0.254: ?.1@44.575,47.9 46.8,47.9 J6.2@47,48.1
"S1: AIN1": ?.1@27.641,83.112 J3.3 | length 2.5
  Bottom Layer w0.254: J3.3 25.209,83.15 27.603,83.15 ?.1@27.641,83.112
"S1: AIN2": ?.1@27.749,85.805 J3.2 | length 2.6
  Bottom Layer w0.254: J3.2 25.209,85.766 27.711,85.766 ?.1@27.749,85.805
"S1: AO1": J3.14 P1.1 | length 10.7
  Bottom Layer w1: J3.14 39.188,83.188 43.5,87.5 46.742,87.5 P1.1
"S1: AO2": J3.13 P1.2 | length 10.7
  Bottom Layer w1: J3.13 39.448,80.648 43.741,84.941 P1.2
"S1: BIN1": ?.1@27.673,78.134 J3.5 | length 2.5
  Bottom Layer w0.254: J3.5 25.184,78.121 27.66,78.121 ?.1@27.673,78.134
"S1: BIN2": ?.1@27.774,75.568 J3.6 | length 2.6
  Bottom Layer w0.254: J3.6 ?.1@27.774,75.568
"S1: BO1": J3.11 P1.4 | length 10.7
  Bottom Layer w1: J3.11 39.568,75.568 43.861,79.861 P1.4
"S1: BO2": J3.12 P1.3 | length 10.8
  Bottom Layer w1: J3.12 39.308,78.108 43.7,82.5 46.662,82.5 P1.3
"S2: AIN1": ?.1@28.036,28.767 J4.3 | length 2.8
  Bottom Layer w0.254: J4.3 25.278,28.738 28.007,28.738 ?.1@28.036,28.767
"S2: AIN2": ?.1@28.125,31.25 J4.2 | length 2.9
  Bottom Layer w0.254: J4.2 ?.1@28.125,31.25
"S2: AO1": J4.14 P2.1 | length 11.7
  Bottom Layer w1: J4.14 40.29,28.71 44.7,24.3 47.698,24.3 P2.1
"S2: AO2": J4.13 P2.2 | length 11.7
  Bottom Layer w1: J4.13 40.23,26.17 44.745,21.655 P2.2
"S2: BIN1": ?.1@28,23.5 J4.5 | length 2.8
  Bottom Layer w0.254: J4.5 27.845,23.63 27.975,23.5 ?.1@28,23.5
"S2: BIN2": ?.1@28.1,21.1 J4.6 | length 2.9
  Bottom Layer w0.254: J4.6 25.255,21.095 28.095,21.095 ?.1@28.1,21.1
"S2: BO1": J4.11 P2.4 | length 11.8
  Bottom Layer w1: J4.11 39.91,21.09 44.5,16.5 47.728,16.5 P2.4
"S2: BO2": J4.12 P2.3 | length 11.7
  Bottom Layer w1: J4.12 39.87,23.63 44.385,19.115 P2.3
SBWTCK: J12.4 U3.21 | length 35.2
  Top Layer w0.254: v1(20.6,42) 20.794,42.194 20.794,43 25.8,48.006 U3.21
  Bottom Layer w0.254: J12.4 7.4,28.8 v1(20.6,42)
SBWTDIO: J12.3 U3.22 | length 37.1
  Top Layer w0.254: v1(22.4,42) 22.4,43.903 26.45,47.953 U3.22
  Bottom Layer w0.254: J12.3 7.93,27.53 v1(22.4,42)
"Solenoid PWM Signal": ?.1@44.475,63.8 J11.2 | length 2.4
  Bottom Layer w0.254: ?.1@44.475,63.8 J11.2
"Step PWM": ?.1@26.8,63.475 J3.1 J3.7 J4.1 J4.7 | length 102.5
  Top Layer w0.254: J3.7 25.028,73.171 25.028,74.171 22.3,76.9 22.3,85.397 J3.1 ; J4.1 25.34,33.7 34.3,33.7 41.1,40.5 41.1,63.1 39.5,64.7 28.025,64.7 ?.1@26.923,63.598 ; v1(26.4,65) 26.8,64.6 ?.1@26.8,63.475
  Bottom Layer w0.254: J3.7 26.4,71.8 v1(26.4,65) ; J4.7 21.8,22 21.8,30.34 J4.1
"USB 5V": C9.1 C10.1 D3.2 L1.1 U4.4 U4.20 | length 144.8
  Top Layer w0.254: L1.1@12.722,14.95 12.945,14.95 17.4,14.95 23.125,9.225 ; U4.4 23.125,9.225 ; C10.1 43.973,9.873 41.7,7.6 C9.1 38.4,7.6 36.8,6 33.494,6 U4.20 33.444,6 31.5,6 30.6,5.1 30.6,3.9 28.459,1.759 25.041,1.759 23.125,3.675 23.125,9.225
  Top Layer w0.5: L1.1 13.045,15.092 14.803,16.85 v1(14.823,16.85) ; D3.2 16.59,61.3 v1(20.8,61.3)
  Bottom Layer w0.5: v1@14.5,16.8 20.704,16.8 24.004,13.5 30,13.5 35.6,19.1 35.6,37.3 41.9,37.3 46.6,42 46.6,43.1 35.5,54.2 27.9,54.2 v1(20.8,61.3)
USBRX: ?.2@3.85,31.3 J12.6 U4.5 | length 43
  Top Layer w0.254: v1(6.2,30) 6.364,29.836 8.064,29.836 9.822,28.078 12.222,28.078 16.692,23.608 16.692,21.308 25,13 28,13 29.2,11.8 29.2,9.1 28.675,8.575 U4.5
  Bottom Layer w0.254: J12.6 1.32,31.32 3.83,31.32 3.85,31.3 3.875,31.3 3.973,31.202 3.973,30.99 4.963,30 v1(6.2,30)
USBTX: ?.2@3.9,25 J12.1 U4.1 | length 31.7
  Top Layer w0.254: v1@24.437,10.563 v1(24.4,10.6) 24.613,10.6 25.188,11.175 U4.1
  Bottom Layer w0.254: J12.1 1.305,24.995 3.895,24.995 3.9,25 3.925,25 4.023,24.902 4.023,24.69 18.113,10.6 v1(24.4,10.6)
pads on no net: J13.MH1 J13.MH2 U3.1 U3.2 U3.12 U3.14 U3.15 U3.16 U3.17 U3.18 U3.19 U3.20 U3.25 U3.30 U3.31 U3.35 U3.36 U3.37 U4.2 U4.8 U4.9 U4.10 U4.12 U4.13 U4.14 U4.19 U4.22 U4.23 U4.24 U4.25 U4.26 U4.27 U4.28

## Polygon pours and split planes (outlines as drawn)
GND on Top Layer "GND_L01_P000" (solid, pour order 0): -0.1,100 49.8,100 49.8,0.1 49.9,0 -0.1,0

## Silkscreen, mask and mechanical layers (free items; w line width, h text height)
Top Overlay:
  text "GND" at 9.9,95 h1
  text "12 V" at 14.3,90.6 h1
  text "L 5V" at 1.9,68.5 h1
  text "5V" at 2.5,64.4 h1
  text "3.3V" at 1.1,45.6 h1

## Text inside footprints (layer, text, board x,y; h text height)
J3: Top Overlay "GND" at 33.506,69.933 h1; Top Overlay "PWMA" at 27.029,87.713 h1
J4: Top Overlay "PWMA" at 27.108,33.235 h1; Top Overlay "GND" at 33.585,15.455 h1